# Altium PCB MT-MONITOR V1.0.0.PcbDoc (part 1 of 3)
Units mil, origin at the board's own origin, x right, y up, seen from the top; angles counter-clockwise.
Board outline 6300 x 4410 mil, 2 copper layers (Top Layer, Bottom Layer); 313 components, 231 nets, 1781 pads, 138 vias.
Unrouted connection lines stored in the file: 1.
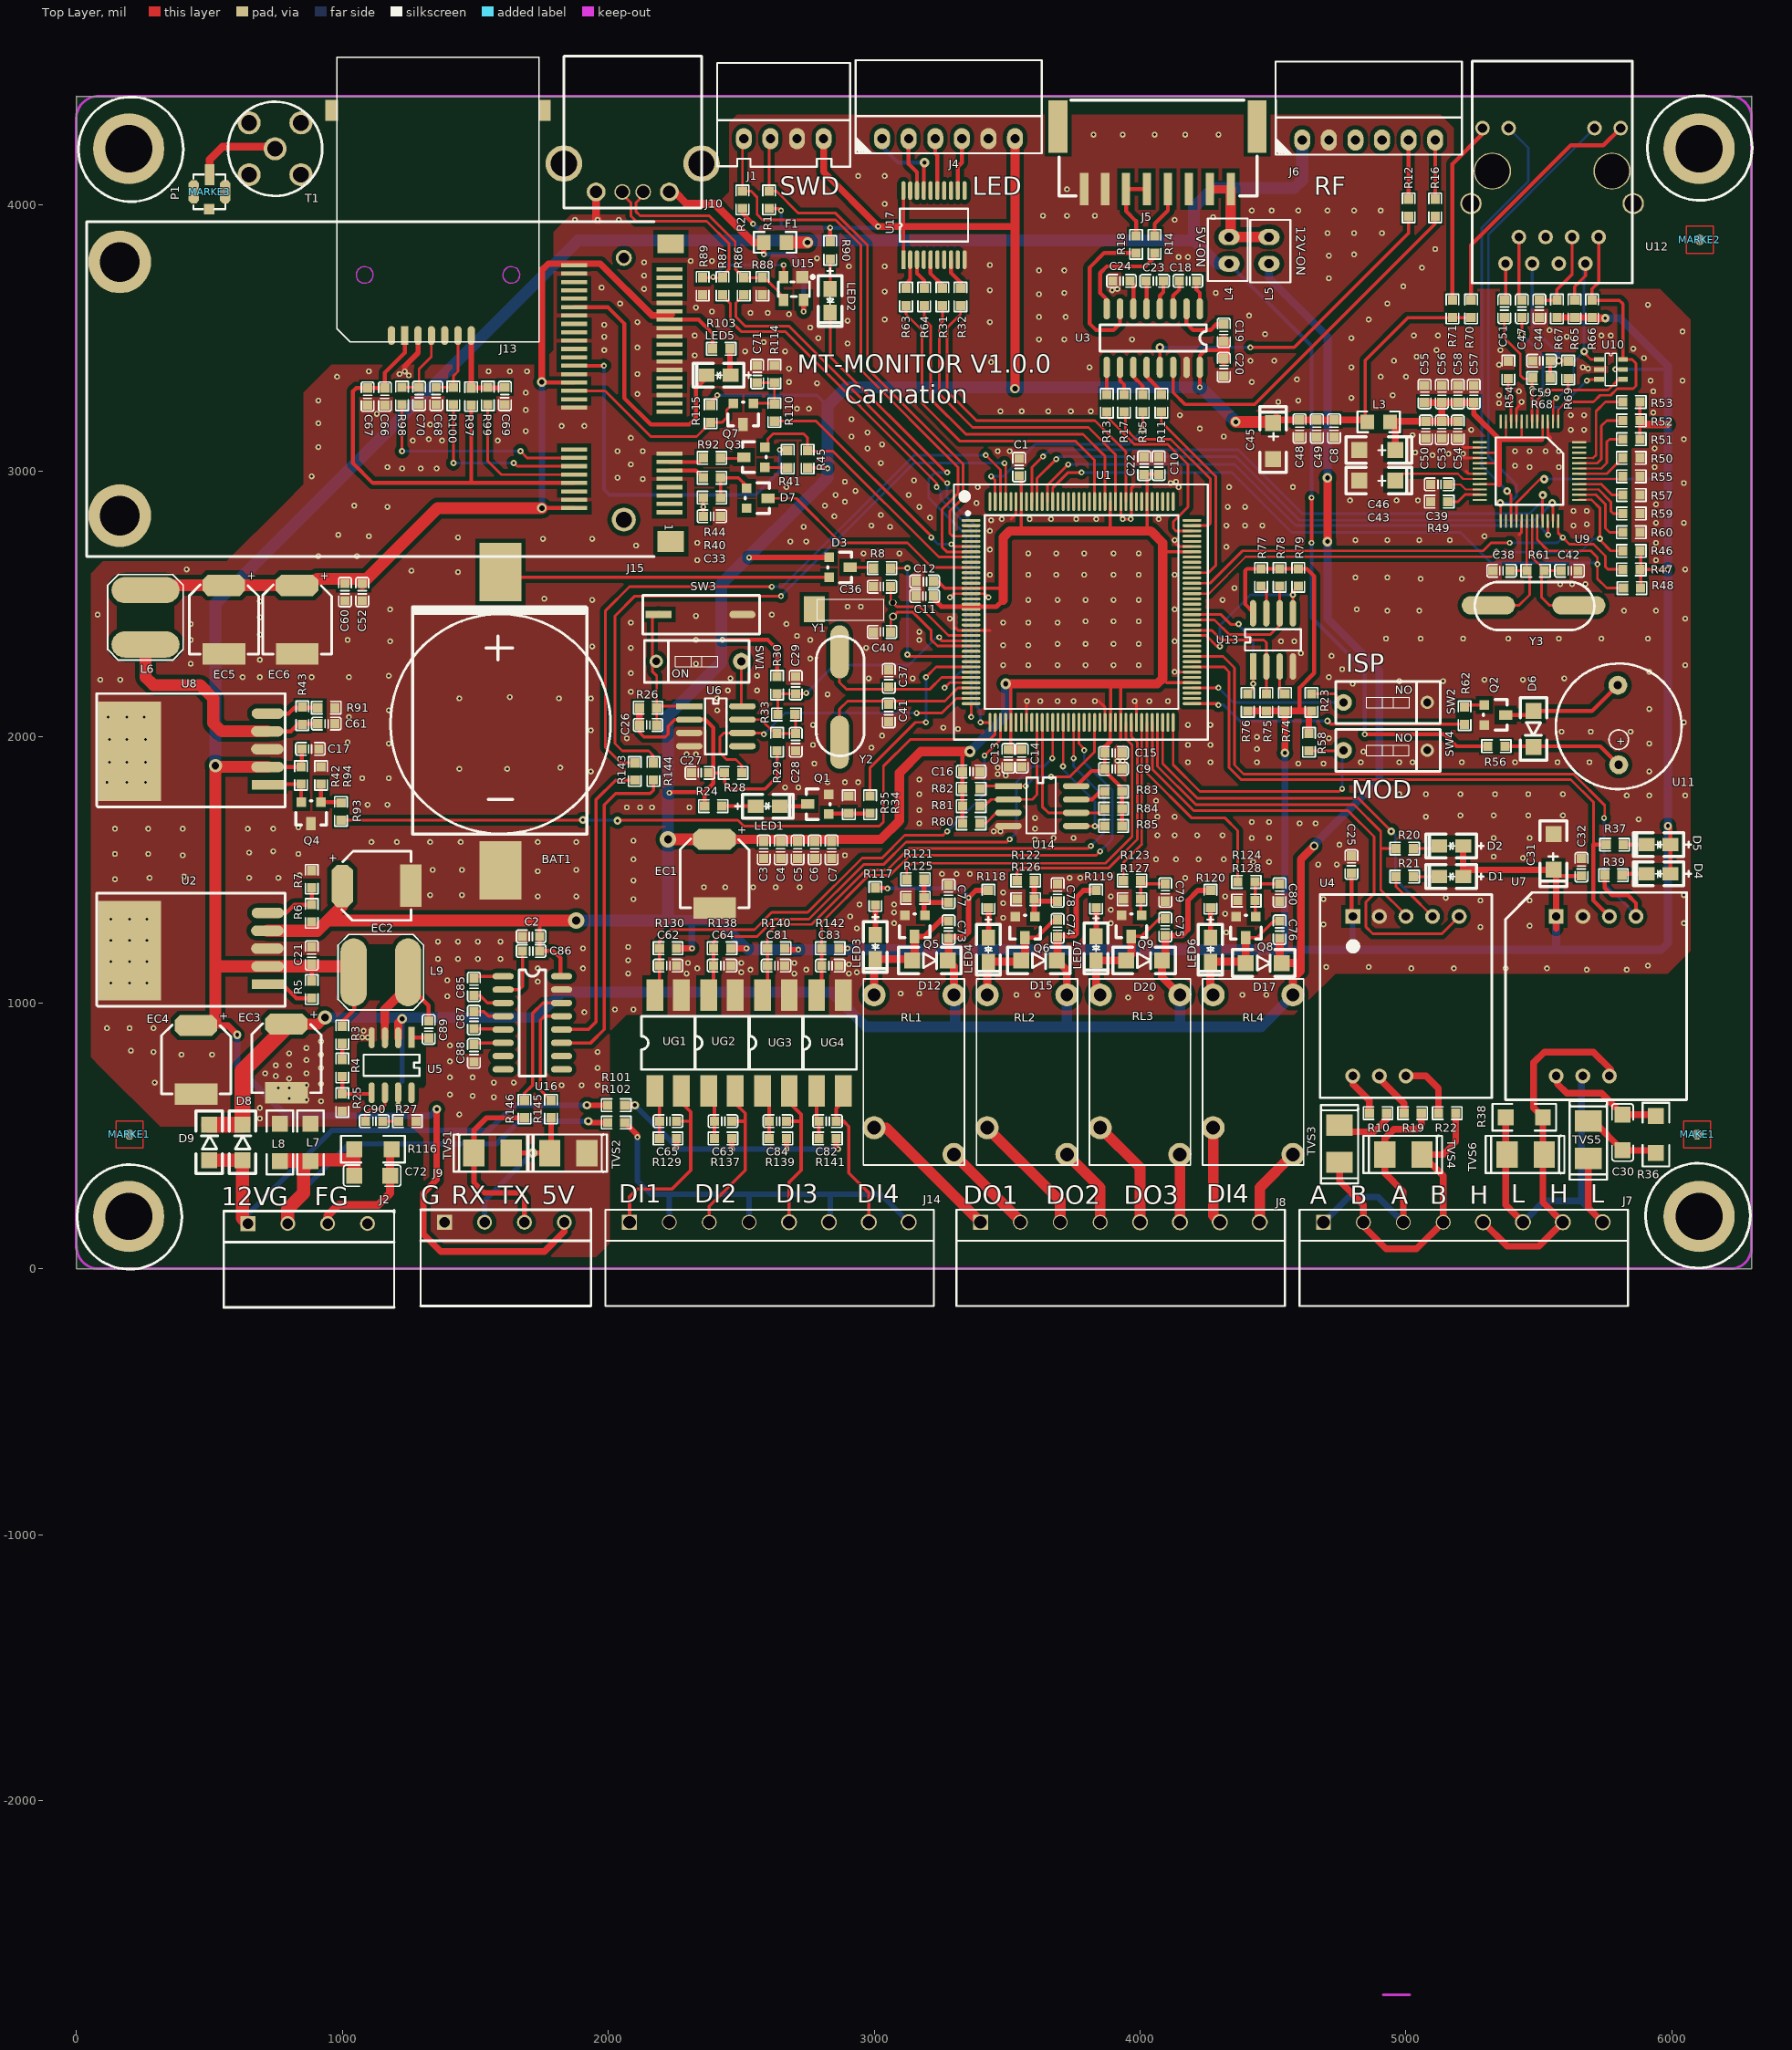
[diagram p0: Top Layer view]
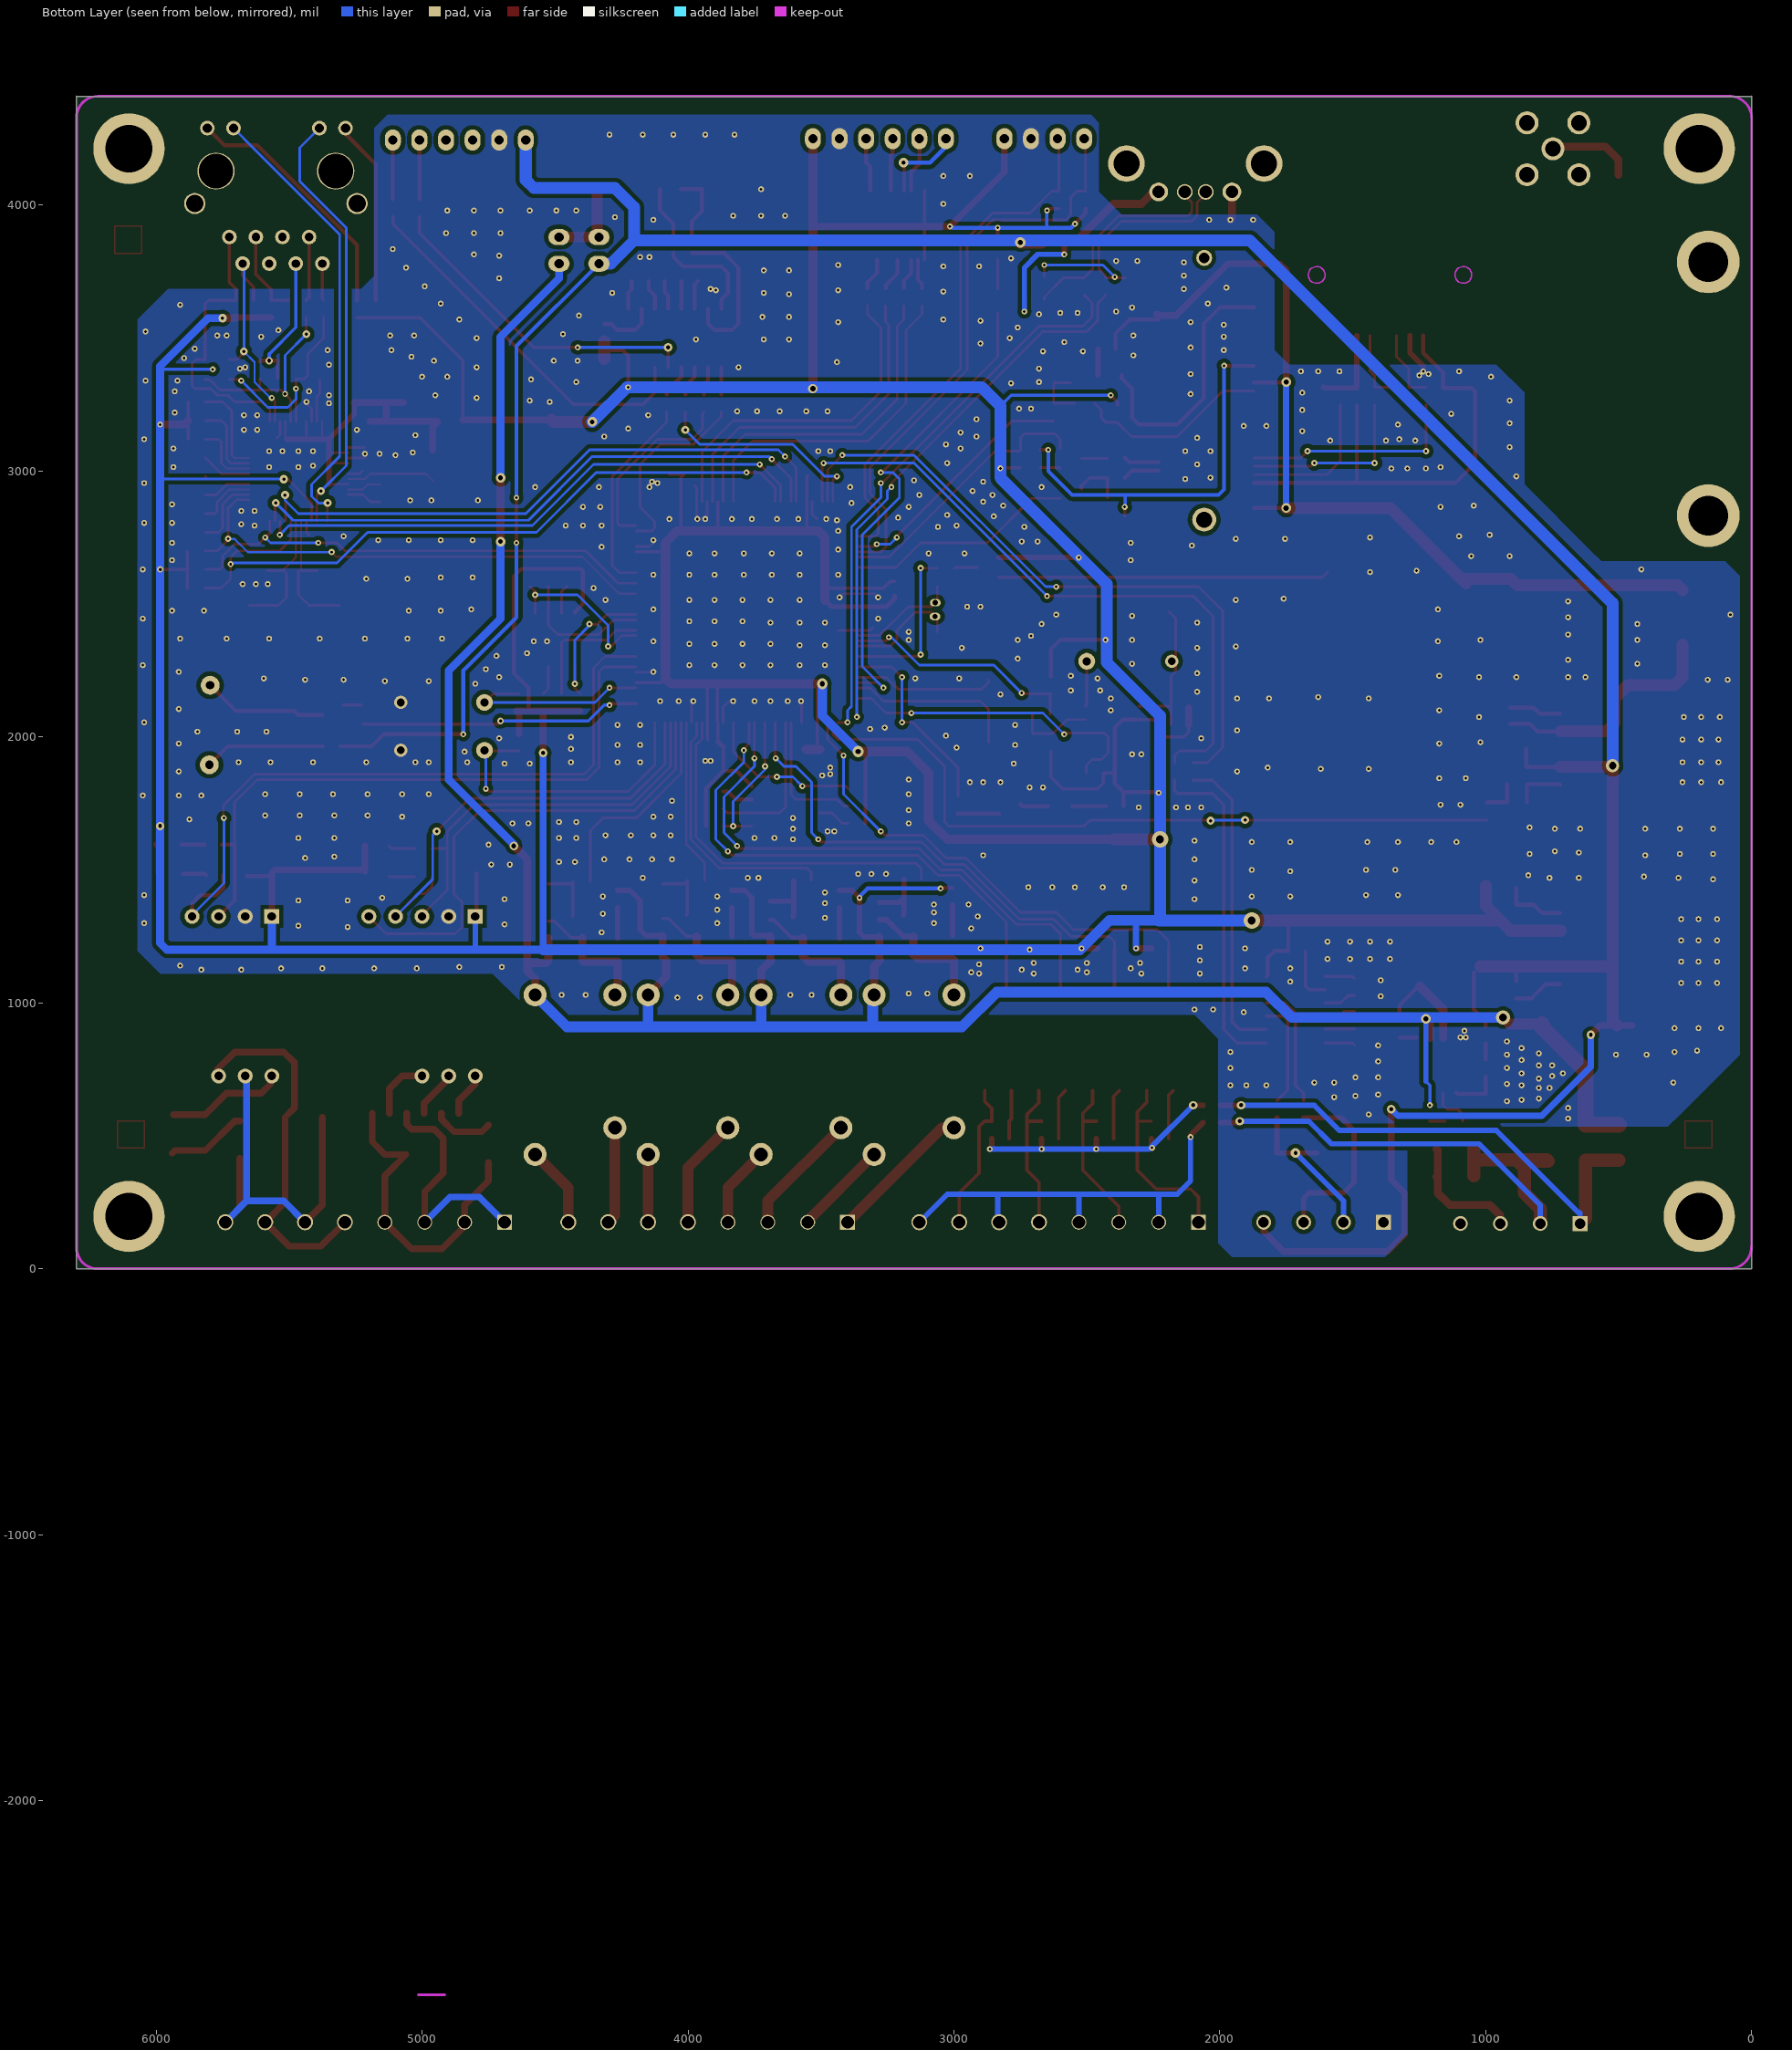
[diagram p1: Bottom Layer view, seen from below]

## Layer stack, top to bottom
Top Layer: signal copper 1.4
Dielectric: dielectric 12.6, FR-4, Dk 4.8
Bottom Layer: signal copper 1.4

## Board outline
0,0 0,60 0,4410 0.55,4409.45 520,4409.45 6299.45,4409.45 6300,4410 6300,4310 6300,0

## Design rules (kind name [scope] priority, off if disabled: settings)
Clearance [All] p1 off: gap=10
ComponentClearance [All] p1 off: gap=10 collisioncheckmode=3 verticalgap=10 showdistances=FALSE
DiffPairsRouting [All] p1: maxlimit=100 minlimit=8 mostfreqgap=10 maxuncoupledlength=500
MinimumSolderMaskSliver [All] p1 off: minsoldermaskwidth=10
PasteMaskExpansion [All] p1 off: expansion=0
PlaneConnect [All] p1: planeconnectstyle=Direct reliefexpansion=20 reliefentries=4 reliefconductorwidth=10 reliefairgap=10
PolygonConnect [All] p1: connectstyle=Direct reliefconductorwidth=10 reliefentries=4 polygonreliefangle="90 Angle" airgapwidth=10
RoutingVias [All] p1: holewidth=10 width=24 viastyle="Through Hole" minholewidth=8 minwidth=12 maxholewidth=50 maxwidth=80
SilkToSilkClearance [All] p1 off: silktosilkclearance=10
SilkToSolderMaskClearance [IsPad] p1 off: minsilkscreentomaskgap=10 clearancetoexposedcopper=TRUE
SolderMaskExpansion [All] p1 off: expansion=4
UnConnectedPin [All] p1 off:
Width [All] p1: maxlimit=196.85 minlimit=8 preferedwidth=10 minimp=50.000000 maximp=50.000000 favimp=50.000000
21 further rules are at their usual default settings.

## Components (designator, comment, footprint, x,y, rotation, side; value= is the part's Value field where it differs from the comment)
BAT1 "Battery" battery 1595,2620 r180 top locked
C1 "104" 0603C 3545,3015 r90 top
C2 "104" 0603C 1710,1250 r180 top
C3 "104" 0603C 2585,1575 r270 top
C4 "104" 0603C 2648.75,1575 r270 top
C5 "104" 0603C 2712.5,1575 r270 top
C6 "104" 0603C 2776.25,1575 r270 top
C7 "104" 0603C 2840,1575 r270 top
C8 "104" 0603C 4730,3160 r270 top
C9 "104" 0603C 3900,1880 r0 top
C10 "104" 0603C 4070,3020 r90 top
C11 "104" 0603C 3190,2530 r180 top
C12 "104" 0603C 3190,2585 r0 top
C13 "104" 0603C 3505,1920 r270 top
C14 "104" 0603C 3555,1920 r270 top
C15 "104" 0603C 3900,1940 r0 top
C16 "103" 0603C 3365,1870 r0 top
C17 "104" 0603C 880,1955 r180 top
C18 "0.1uF" 0603C 4180,3715 r0 top
C19 "0.1uF" 0603C 4315,3520 r270 top
C20 "1uF" 0603C 4315,3390 r90 top
C21 "104" 0603C 885,1178.34 r270 top
C22 "104" 0603C 4015,3020 r90 top
C23 "0.1uF" 0603C 4055,3715 r0 top
C24 "0.1uF" 0603C 3930,3715 r0 top
C25 "104" 0603C 4795,1520 r90 top
C26 "104" 0603C 2150,2045 r0 top
C27 "104" 0603C 2345,1865 r180 top
C28 "104" 0603C 2705,1980 r90 top
C29 "104" 0603C 2705,2195 r270 top
C30 "103/2KV/1206" 1206C 5815,580 r270 top
C31 "10uF/16V" CA1206 5555,1500 r270 top
C32 "0.1uF" 0603C 5660,1510 r270 top
C33 "0.1uF" C0603 2390,2830 r0 top
C36 "22P" 0603C 3030,2565 r180 top
C37 "22P" 0603C 3055,2220 r90 top
C38 "18p" 0603C 5360,2625 r180 top
C39 "0.1u" 0603C 5125,2950 r0 top
C40 "22P" 0603C 3030,2395 r180 top
C41 "22P" 0603C 3055,2090 r270 top
C42 "18p" 0603C 5615,2625 r0 top
C43 "4.7uF/6.3V" CA1206 4960,2965 r0 top
C44 "0.22u" 0603C 5502,3610 r90 top
C45 "22uF/16V" CA1206 4500,3180 r90 top
C46 "22uF/16V" CA1206 4960,3080 r0 top
C47 "0.068uF" 0603C 5436,3610 r90 top
C48 "0.1u" 0603C 4600,3160 r270 top
C49 "0.1u" 0603C 4665,3160 r270 top
C50 "0.1u" 0603C 5075,3155 r270 top
C51 "0.068uF" 0603C 5370,3610 r90 top
C52 "0.1uF" C0603 1075,2545 r270 top
C53 "0.1u" 0603C 5135,3155 r270 top
C54 "0.1u" 0603C 5195,3155 r270 top
C55 "0.1u" 0603C 5070,3290 r90 top
C56 "0.1u" 0603C 5135,3290 r90 top
C57 "0.1u" 0603C 5255,3290 r90 top
C58 "0.1u" 0603C 5195,3290 r90 top
C59 "0.1u" 0603C 5510,3415 r180 top
C60 "0.1uF" C0603 1010,2545 r270 top
C61 "0.1uF" C0603 940,2050 r0 top
C62 "104" 0603C 2225,1140 r0 top
C63 "104" 0603C 2431.67,555 r0 top
C64 "104" 0603C 2428.33,1140 r0 top
C65 "104" 0603C 2225,555 r0 top
C66 "33pF" C0603 1160,3280 r270 top
C67 "1uF" C0603 1095,3280 r270 top
C68 "33pF" C0603 1353.12,3282.5 r270 top
C69 "33pF" C0603 1611.25,3282.5 r270 top
C70 "33pF" C0603 1288.75,3282.5 r270 top
C71 "0.1uF" C0603 2560,3365 r90 top
C72 "103/2KV/1206" 1206C 1045,350 r0 top
C73 "104" 0603C 3280,1275 r90 top
C74 "104" 0603C 3690,1280 r270 top
C75 "104" 0603C 4095,1285 r270 top
C76 "104" 0603C 4525,1275 r90 top
C77 "104" 0603C 3280,1410 r90 top
C78 "104" 0603C 3690,1415 r270 top
C79 "104" 0603C 4095,1415 r90 top
C80 "103" 0603C 4525,1415 r270 top
C81 "104" 0603C 2631.67,1140 r0 top
C82 "104" 0603C 2825,555 r0 top
C83 "104" 0603C 2835,1140 r0 top
C84 "104" 0603C 2638.33,555 r0 top
C85 "0.1uF" 0603C 1495,1060 r90 top
C86 "0.1uF" 0603C 1710,1195 r0 top
C87 "0.1uF" 0603C 1495,935 r90 top
C88 "0.1uF" 0603C 1495,810 r90 top
C89 "103" 0603C 1325,900 r270 top
C90 "3.9nF" 0603C 1120,555 r0 top
D1 "LED" D0805 5215,1475 r270 top
D2 "LED" D0805 5215,1590 r270 top
D3 "BAV54C" SOT23 2830,2675 r270 top
D4 "LED" D0805 5995,1485 r270 top
D5 "LED" D0805 5995,1595 r270 top
D6 "1N4148" 1206D 5480,2030 r270 top
D7 "BAT54-V" SOT23 2520,2935 r270 top
D8 "1N4007" 1206D 625,475 r90 top
D9 "1N4007" 1206D 500,475 r90 top
D12 "1N4007" 1206D 3210,1160 r0 top
D15 "1N4007" 1206D 3620,1160 r0 top
D17 "1N4007" 1206D 4465,1150 r0 top
D20 "1N4007" 1206D 4015,1160 r0 top
EC1 "100uF/16V" C100UF16VEJ 2400,1615 r270 top
EC2 "100uF,25V" C100UF16VEJ 1000,1440 r0 top
EC3 "100uF,25V" C100UF16VEJ 790,920 r270 top
EC4 "100uF/35V" C100UF16VEJ 450,915 r270 top
EC5 "220uF/10V" C100UF16V 555,2570 r270 top
EC6 "220uF/10V" C100UF16V 830,2570 r270 top
F1 "0.5A/0805" 0805R 2670,3860 r180 top
J1 "HEADER 4" COM-2.54mm-90 2510,4270 r0 top
J2 "HEADER 4" KF2EDG-4P-3.81mm 645,170 r0 top
J4 "CON6" CON6-2.54mm-90 3030,4250 r0 top
J5 "CON8" HY-8A-2.00mm 3790,4060 r180 top
J6 "CON6" CON6-2.54mm-90 4610,4245 r0 top locked
J7 "CON8" KF2EDG-8P-3.81mm 4690,175 r0 top locked
J8 "CON8" KF2EDG-8P-3.81mm 3400,175 r0 top locked
J9 "HEADER 4" KF2EDG-4P-3.81mm 1385,175 r0 top locked
J10 "CON5" USB-A 2230,4050 r180 top locked
J13 "GPRS,UIM" SIM6-AUTO 1235,3510 r180 top locked
J14 "CON8" KF2EDG-8P-3.81mm 2080,175 r0 top locked
J15 "PCI-E" MC2716 2230,2845 r270 top locked
L3 "1uH" 0805R 4855,3185 r0 top
L4 "0" CON02_2.54 4335,3930 r90 top
L5 "0" CON02_2.54 4485,3730 r270 top
L6 "22uH" LC7*7*3_L 260,2450 r90 top
L7 "1uH" 1206R 880,405 r90 top
L8 "1uH" 1206R 765,405 r90 top
L9 "22uH" LC7*7*3_L 1145,1115 r180 top
LED1 "RED" D0805 2555,1740 r90 top
LED2 "RED" D0805 2835,3685 r0 top
LED3 "RED" D0805 3005,1255 r0 top
LED4 "RED" D0805 3430,1245 r0 top
LED5 "Green" D0805 2460,3360 r270 top
LED6 "RED" D0805 4265,1245 r0 top
LED7 "RED" D0805 3835,1250 r0 top
MAKE1 "MARK1.0" MARK1.0 6095,505 r90 top
MARKE1 "MARK1.0" MARK1.0 200,505 r90 top
MARKE2 "MARK1.0" MARK1.0 6105,3870 r90 top
MARKE3 "P1" IPEX 560,4050 r90 top
Q1 "8050" SOT23 2830,1710 r90 top
Q2 "8050" SOT23 5295,2120 r270 top
Q3 "9013" SOT23 2590,3015 r90 top
Q4 "9013" SOT23 920,1755 r180 top
Q5 "8050" SOT23 3190,1330 r180 top
Q6 "8050" SOT23 3605,1325 r180 top
Q7 "9013" SOT23 2545,3255 r180 top
Q8 "8050" SOT23 4435,1325 r180 top
Q9 "8050" SOT23 4005,1330 r180 top
R1 "10K" 0603R 2605,4020 r270 top
R2 "10K" 0603R 2505,4020 r270 top
R3 "43k" 0603R 1000,880 r270 top
R4 "1.2kΩ" 0603R 1000,755 r270 top
R5 "4K7" 0603R 885,1050 r270 top
R6 "2K/1%" 0603R 885,1336.67 r270 top
R7 "1.2K/1%" 0603R 885,1465 r270 top
R8 "20K" 0603R 3030,2635 r0 top
R10 "10R" 0603R 4895,585 r0 top
R11 "0R" 0603R 4080,3255 r90 top
R12 "10R" 0603R 5010,3990 r90 top
R13 "0R" 0603R 3875,3255 r90 top
R14 "10R" 0603R 4055,3852.5 r90 top
R15 "0R" 0603R 4010,3255 r90 top
R16 "10R" 0603R 5110,3990 r90 top
R17 "0R" 0603R 3940,3255 r90 top
R18 "10R" 0603R 3985,3852.5 r90 top
R19 "10R" 0603R 5025,585 r0 top
R20 "10R" 0603R 4995,1580 r180 top
R21 "10R" 0603R 4995,1475 r180 top
R22 "10R" 0603R 5155,585 r0 top
R23 "10K" 0603R 4645,2130 r270 top
R24 "10K" 0603R 2395,1740 r180 top
R25 "10k" 0603R 1000,625 r270 top
R26 "10K" 0603R 2150,2110 r180 top
R27 "6.8k" 0603R 1245,555 r0 top
R28 "10K" 0603R 2470,1865 r0 top
R29 "10K" 0603R 2635,1980 r90 top
R30 "10K" 0603R 2635,2195 r270 top
R31 "2K" 0603R 3256.67,3655 r90 top
R32 "2K" 0603R 3325,3655 r90 top
R33 "1kR" 0603R 2670,2085 r180 top
R34 "10K" 0603R 2985,1745 r270 top
R35 "10K" 0603R 2905,1745 r270 top
R36 "1M" 1206R 5940,575 r270 top
R37 "2k" 0603R 5785,1595 r180 top
R38 "120R" 1206R 5374.67,570.04 r0 top
R39 "2k" 0603R 5780,1480 r180 top
R40 "5.1K" R0603 2390,2900 r180 top
R41 "10K" R0603 2675,3045 r90 top
R42 "10K" R0603 845,1855 r90 top
R43 "2.7K 1%" R0603 850,2080 r270 top
R44 "100R" R0603 2390,2975 r0 top
R45 "10K" R0603 2750,3045 r90 top
R46 "10k" 0603R 5847.5,2700 r0 top
R47 "10k" 0603R 5847.5,2630 r0 top
R48 "10k" 0603R 5850,2560 r0 top
R49 "10k" 0603R 5125,2885 r180 top
R50 "10k" 0603R 5847.49,3050 r180 top
R51 "10k" 0603R 5847.49,3120 r180 top
R52 "10k" 0603R 5847.49,3190 r180 top
R53 "10k" 0603R 5847.49,3260 r180 top
R54 "12.4K[1%]" 0603R 5385,3380 r90 top
R55 "10K" 0603R 5847.5,2980 r0 top
R56 "10R" 0603R 5340,1965 r180 top
R57 "10K" 0603R 5847.5,2910 r0 top
R58 "10K" 0603R 4635,1980 r90 top
R59 "10k" 0603R 5847.5,2840 r0 top
R60 "10k" 0603R 5847.5,2770 r0 top
R61 "1M" 0603R 5487.5,2625 r0 top
R62 "4K7" 0603R 5220,2080 r270 top
R63 "2K" 0603R 3120,3655 r90 top
R64 "2K" 0603R 3188.33,3655 r90 top
R65 "49.9[1%]" 0603R 5634,3610 r270 top
R66 "49.9[1%]" 0603R 5700,3610 r270 top
R67 "10[1%]" 0603R 5568,3610 r270 top
R68 "82[1%]" 0603R 5510,3350 r180 top
R69 "82[1%]" 0603R 5610,3380 r270 top
R70 "200" 0603R 5245,3610 r90 top
R71 "200" 0603R 5175,3610 r90 top
R74 "10K" 0603R 4545,2130 r90 top
R75 "10K" 0603R 4475,2130 r90 top
R76 "10K" 0603R 4405,2130 r90 top
R77 "10K" 0603R 4455,2600 r270 top
R78 "10K" 0603R 4525,2600 r270 top
R79 "10K" 0603R 4595,2600 r270 top
R80 "10K" 0603R 3365,1675 r0 top
R81 "10K" 0603R 3365,1740 r0 top
R82 "10K" 0603R 3365,1805 r0 top
R83 "10K" 0603R 3900,1795 r180 top
R84 "10K" 0603R 3900,1730 r180 top
R85 "10K" 0603R 3899.99,1665 r180 top
R86 "33R" 0603R 2510,3695 r270 top
R87 "33R" 0603R 2430,3695 r270 top
R88 "15K" 0603R 2580,3695 r90 top
R89 "15K" 0603R 2355,3695 r90 top
R90 "15K" 0603R 2835,3830 r90 top
R91 "1.2K 1%" R0603 940,2110 r0 top
R92 "100R" R0603 2390,3050 r180 top
R93 "2K" R0603 995,1720 r90 top
R94 "10K" R0603 920,1855 r270 top
R97 "10K" R0603 1485,3280 r270 top
R98 "22R" R0603 1224.38,3282.49 r270 top
R99 "22R" R0603 1546.88,3282.49 r270 top
R100 "22R" R0603 1417.5,3282.49 r270 top
R101 "0R" 0603R 2030,615 r0 top
R102 "0R" 0603R 2030,550 r0 top
R103 "470R" R0603 2425,3460 r0 top
R110 "10K" R0603 2625,3220 r270 top
R114 "10K" R0603 2625,3365 r90 top
R115 "10K" R0603 2385,3215 r270 top
R116 "1M" 1206R 1045,450 r0 top
R117 "10K" 0603R 3005,1400 r90 top
R118 "10K" 0603R 3430,1390 r90 top
R119 "10K" 0603R 3835,1390 r90 top
R120 "10K" 0603R 4265,1390 r90 top
R121 "5.1K" 0603R 3155,1465 r0 top
R122 "5.1K" 0603R 3570,1460 r0 top
R123 "5.1K" 0603R 3970,1460 r0 top
R124 "5.1K" 0603R 4400,1455 r0 top
R125 "4.7K" 0603R 3155,1395 r0 top
R126 "4.7K" 0603R 3570,1390 r0 top
R127 "4.7K" 0603R 3970,1390 r0 top
R128 "4.7K" 0603R 4400,1385 r0 top
R129 "10K" 0603R 2225,490 r180 top
R130 "10K" 0603R 2225,1205 r180 top
R137 "10K" 0603R 2431.67,490 r180 top
R138 "10K" 0603R 2428.33,1205 r180 top
R139 "10K" 0603R 2638.33,490 r180 top
R140 "10K" 0603R 2631.67,1205 r180 top
R141 "10K" 0603R 2825,490 r180 top
R142 "10K" 0603R 2835,1205 r180 top
R143 "0R" 0603R 2100,1870 r270 top
R144 "0R" 0603R 2170,1870 r270 top
R145 "10R" 0603R 1785,600 r270 top
R146 "10R" 0603R 1685,600 r270 top
RL1 "JQ1P-24V" HF32F-12V 3040,1030 r90 top
RL2 "JQ1P-24V" HF32F-12V 3465,1030 r90 top
RL3 "JQ1P-24V" HF32F-12V 3890,1030 r90 top
RL4 "JQ1P-24V" HF32F-12V 4315,1030 r90 top
SW1 "SW SPST" SW1#1 2165,2285 r270 top
SW2 "SW SPST" SW1#2 5100.57,2129.57 r90 top
SW3 "按键" SW 2190,2460 r0 top
SW4 "SW SPST" SW1#3 5100.22,1949.57 r90 top
T1 "MARK1.0" TXZ-GSM 650,4115 r45 top locked
TVS1 "BA301N/NC" 3528TVS 1495,435 r180 top
TVS2 "BA301N" 3528TVS 1920,435 r0 top
TVS3 "BA301N" 3528TVS 4750,540 r90 top
TVS4 "BA301N" 3528TVS 5060,430 r0 top
TVS5 "BA301N" 3528TVS 5685.25,555.09 r90 top
TVS6 "BA301N" 3528TVS 5520,430 r0 top
U1 "LPC1778FBD144" LC-LQFP-144_20x20x05P 3780,2470 r270 top
U2 "MIC29302" TO5B 720,1070 r180 top
U3 "SP3232" SO-16 4225,3610 r270 top
U4 "RSM485S_CTM8251T" RSM485 4800,1325 r0 top
U5 "EUP3484" SOP8#1 1260,865 r270 top
U6 "SP706SEN" SOP8#2 2305,2115 r0 top
U7 "CTM8251" CTM8251KT 5565,1325 r270 top
U8 "MIC29302" TO5B 720,1820 r180 top
U9 "W5500" W5500 5480,2990 r270 top
U10 "NUP4301MR6" TSOP-6 5725,3420 r0 top
U11 "BELL" BUZ 5600,2045 r0 top
U12 "FC-256GYNL (or 13F-60FGYDPNW2)" RJ45-2 5725,3880 r0 top locked
U13 "FM25CL64" SOP8#2 4425.24,2265.24 r90 top
U14 "MX25L1635DM2I-10G" MX25L1635E 3505,1815 r0 top
U15 "PRTR5V0U2X" SOT-143B 2730,3730 r180 top
U16 "SP3232" SO-16 1605,1100 r0 top
U17 "74HC245" TSSOP20 3110,3795 r90 top
UG1 "PS2501L-1" DIP-4 2175,670 r180 top
UG2 "PS2501L-1" DIP-4 2377.79,670 r180 top
UG3 "PS2501L-1" DIP-4 2580.59,670 r180 top
UG4 "PS2501L-1" DIP-4 2783.38,670 r180 top
Y1 "32.768KHz" ZS-32.768 3070.21,2505.15 r180 top
Y2 "12M" ZS_SMD 2870,1980 r90 top
Y3 "25MHz" ZS_SMD 5310,2495 r0 top

## Footprints (in the part's own frame and the unit in brackets; to place one, negate y for a bottom-side part, rotate by r counter-clockwise, add the part's x,y. Pads: shape width x height; smd on the part's side, far side on the other; paste and mask are expansions set on the pad)
0603C [mil]
  rect 35x35 smd: 1(-32.5,0) 2(32.5,0)
  silkscreen extent -55,-24 55,24
0603R [mil]
  rect 35x35 smd: 1(-32.5,0) 2(32.5,0)
  silkscreen extent -55,-24 55,24
0805R [mil]
  rect 52x56 smd: 1(0,0) 2(85,0)
  silkscreen extent -37,-39 122,39
1206C [mil]
  rect 60x60 smd: 1(0,0) 2(135,0)
  silkscreen extent -40,-40 175,40
1206D [mil]
  rect 60x60 smd: 1(-67.5,0) 2(67.5,0)
  silkscreen extent -118,-50 117,50
1206R [mil]
  rect 60x60 smd: 1(0.33,-0.04) 2(140.33,-0.04)
  silkscreen extent -50,-50 190,50
3528TVS [mil]
  rect 80x100 smd: 1(0.09,-0.25) 2(-139.91,-0.25)
  silkscreen extent -220,-70 76,70
battery [mm]
  rect 4x5.588 smd mask+0.102: 1(0,0)
  rect 4x5.588 smd: 2(0,28.5)
  silkscreen extent -10.5,3.3 10.5,25.02
BUZ [mm]
  round 1.8 hole 0.8: 1(5.08,-3.8) 2(5,3.8)
  silkscreen extent -0.92,-6.13 11.08,5.87
C100UF16V [mil]
  oct 80x160 smd: 1(-0.01,-0.43)
  rect 80x160 smd: 2(257.94,0.35)
  silkscreen extent -2,-130 258,130, body extent 20,-115 240,125, height 197
C100UF16VEJ [mil]
  oct 80x160 smd: 1(-0.01,-0.43)
  rect 80x160 smd: 2(257.94,0.35)
  silkscreen extent -2,-130 258,130
C0603 [mil]
  rect 35x35 smd: 1(-32.5,0) 2(32.5,0)
  silkscreen extent -55,-24 55,24, body extent -33,-15 29,16, height 12
CA1206 [mil]
  rect 60x60 smd: 1(-0.08,-0.48) 2(-135.08,-0.48)
  silkscreen extent -185,-50 62,50
COM-2.54mm-90 [mil]
  oval 60x80 hole 35: 1(0,-20) 2(100,-20) 3(200,-20) 4(300,-20)
  silkscreen extent -100,-125 400,265, body extent -28,-60 334,20, height 264
CON02_2.54 [mil]
  oval 60x80 hole 35: 1(-150,0) 2(-50,0)
  silkscreen extent -215,-70 20,80
CON6-2.54mm-90 [mil]
  oval 60x80 hole 35: 1(0,0) 2(100,0) 3(200,0) 4(300,0) 5(400,0) 6(500,0)
  silkscreen extent -100,-55 600,295
CTM8251KT [mil]
  rect 56x56 hole 32: 1(0,0)
  round 56 hole 32: 2(0,100) 3(0,200) 4(0,300) 6(600,200) 7(600,100) 8(600,0)
  silkscreen extent -90,-190 690,490, body extent -90,-190 690,490, height 276
D0805 [mil]
  rect 50x60 smd: 1(-0.34,-0.09) 2(-0.34,-90.09)
  silkscreen extent -45,-140 45,77
DIP-4 [mm]
  rect 1.6x3 smd: 1(-0.008,0.015) 2(-2.548,0.015) 3(-2.548,-9.129) 4(-0.008,-9.129)
  silkscreen extent -3.82,-7.1 1.26,-2.02
HF32F-12V [mm]
  round 2.2 hole 1.2: 1(0,1.016) 2(0,-6.604)
  round 2.2 hole 1.3: 3(-12.7,1.016) 4(-15.24,-6.604)
  silkscreen extent -16.26,-7.62 1.52,2.03
HY-8A-2.00mm [mm]
  rect 1.8x5 smd: 0(-16.5,-6) 0(2.5,-6)
  rect 0.8x3.1 smd: 1(-14,0) 2(-12,0) 3(-10,0) 4(-8,0) 5(-6,0) 6(-4,0) 7(-2,0) 8(0,0)
  silkscreen extent -16.51,-8.51 2.41,0.64
IPEX [mm]
  rect 2x0.9 smd: 1(1.651,1.5)
  oct 2.2x1 smd: 2(0,3) 2(0,0)
  rect 1x1 smd: 3(-1.651,1.524)
  silkscreen extent -1.65,0 1.65,3.05
KF2EDG-4P-3.81mm [mil]
  rect 56x56 hole 39.37: 1(0,0)
  round 56 hole 39.37: 2(150,0) 3(300,0) 4(450,0)
  silkscreen extent -91,-315 550,50
KF2EDG-8P-3.81mm [mil]
  rect 56x56 hole 47.24: 1(0,0)
  round 56 hole 47.24: 2(150,0) 3(300,0) 4(450,0)
  round 60 hole 47.24: 5(600,0) 6(750,0) 7(900,0) 8(1050,0)
  silkscreen extent -91,-315 1145,47
LC7*7*3_L [mm]
  oval 2.5x6.5 smd: 1(-2.6,0) 2(2.6,0)
  Top Layer pour cut-out: -1.803,2.705 1.854,2.705 1.854,-2.705 -1.803,-2.705
  silkscreen extent -4.09,-3.61 4.09,3.61, body extent -2.46,-2.4 1.85,2.4, height 3.5
LC-LQFP-144_20x20x05P [mm]
  oval 0.28x1.8 smd mask+0.051: 1(-8.75,-10.55) 2(-8.25,-10.55) 3(-7.75,-10.55) 4(-7.25,-10.55) 5(-6.75,-10.55) 6(-6.25,-10.55) 7(-5.75,-10.55) 8(-5.25,-10.55) 9(-4.75,-10.55) 10(-4.25,-10.55) 11(-3.75,-10.55) 12(-3.25,-10.55) 13(-2.75,-10.55) 14(-2.25,-10.55) 15(-1.75,-10.55) 16(-1.25,-10.55) 17(-0.75,-10.55) 18(-0.25,-10.55) 19(0.25,-10.55) 20(0.75,-10.55) 21(1.25,-10.55) 22(1.75,-10.55) 23(2.25,-10.55) 24(2.75,-10.55) 25(3.25,-10.55) 26(3.75,-10.55) 27(4.25,-10.55) 28(4.75,-10.55) 29(5.25,-10.55) 30(5.75,-10.55) 31(6.25,-10.55) 32(6.75,-10.55) 33(7.25,-10.55) 34(7.75,-10.55) 35(8.25,-10.55) 36(8.75,-10.55) 73(8.75,10.55) 74(8.25,10.55) 75(7.75,10.55) 76(7.25,10.55) 77(6.75,10.55) 78(6.25,10.55) 79(5.75,10.55) 80(5.25,10.55) 81(4.75,10.55) 82(4.25,10.55) 83(3.75,10.55) 84(3.25,10.55) 85(2.75,10.55) 86(2.25,10.55) 87(1.75,10.55) 88(1.25,10.55) 89(0.75,10.55) 90(0.25,10.55) 91(-0.25,10.55) 92(-0.75,10.55) 93(-1.25,10.55) 94(-1.75,10.55) 95(-2.25,10.55) 96(-2.75,10.55) 97(-3.25,10.55) 98(-3.75,10.55) 99(-4.25,10.55) 100(-4.75,10.55) 101(-5.25,10.55) 102(-5.75,10.55) 103(-6.25,10.55) 104(-6.75,10.55) 105(-7.25,10.55) 106(-7.75,10.55) 107(-8.25,10.55) 108(-8.75,10.55)
  oval 1.8x0.28 smd mask+0.051: 37(10.55,-8.75) 38(10.55,-8.25) 39(10.55,-7.75) 40(10.55,-7.25) 41(10.55,-6.75) 42(10.55,-6.25) 43(10.55,-5.75) 44(10.55,-5.25) 45(10.55,-4.75) 46(10.55,-4.25) 47(10.55,-3.75) 48(10.55,-3.25) 49(10.55,-2.75) 50(10.55,-2.25) 51(10.55,-1.75) 52(10.55,-1.25) 53(10.55,-0.75) 54(10.55,-0.25) 55(10.55,0.25) 56(10.55,0.75) 57(10.55,1.25) 58(10.55,1.75) 59(10.55,2.25) 60(10.55,2.75) 61(10.55,3.25) 62(10.55,3.75) 63(10.55,4.25) 64(10.55,4.75) 65(10.55,5.25) 66(10.55,5.75) 67(10.55,6.25) 68(10.55,6.75) 69(10.55,7.25) 70(10.55,7.75) 71(10.55,8.25) 72(10.55,8.75) 109(-10.55,8.75) 110(-10.55,8.25) 111(-10.55,7.75) 112(-10.55,7.25) 113(-10.55,6.75) 114(-10.55,6.25) 115(-10.55,5.75) 116(-10.55,5.25) 117(-10.55,4.75) 118(-10.55,4.25) 119(-10.55,3.75) 120(-10.55,3.25) 121(-10.55,2.75) 122(-10.55,2.25) 123(-10.55,1.75) 124(-10.55,1.25) 125(-10.55,0.75) 126(-10.55,0.25) 127(-10.55,-0.25) 128(-10.55,-0.75) 129(-10.55,-1.25) 130(-10.55,-1.75) 131(-10.55,-2.25) 132(-10.55,-2.75) 133(-10.55,-3.25) 134(-10.55,-3.75) 135(-10.55,-4.25) 136(-10.55,-4.75) 137(-10.55,-5.25) 138(-10.55,-5.75) 139(-10.55,-6.25) 140(-10.55,-6.75) 141(-10.55,-7.25) 142(-10.55,-7.75) 143(-10.55,-8.25) 144(-10.55,-8.75)
  silkscreen extent -12.19,-12.19 12.19,12.07
MARK1.0 [mm]
  round 1 smd mask+0.5: 1(0,0)
  Top Layer lines w0.127: -1.3,1.3 1.3,1.3 1.3,-1.3 -1.3,-1.3 -1.3,1.3
MC2716 [mm]
  round 1.524 hole 0.991: 0(-24.3,-4.35)
  round 2.286 hole 1.524: 0(0.7,-4.35)
  rect 0.4x2.5 smd: 1(0,0) 2(-0.4,-9.1) 3(-0.8,0) 4(-1.2,-9.1) 5(-1.6,0) 6(-2,-9.1) 7(-2.4,0) 8(-2.8,-9.1) 9(-3.2,0) 10(-3.6,-9.1) 11(-4,0) 12(-4.4,-9.1) 13(-4.8,0) 14(-5.2,-9.1) 15(-5.6,0) 16(-6,-9.1) 17(-9.6,0) 18(-10,-9.1) 19(-10.4,0) 20(-10.8,-9.1) 21(-11.2,0) 22(-11.6,-9.1) 23(-12,0) 24(-12.4,-9.1) 25(-12.8,0) 26(-13.2,-9.1) 27(-13.6,0) 28(-14,-9.1) 29(-14.4,0) 30(-14.8,-9.1) 31(-15.2,0) 32(-15.6,-9.1) 33(-16,0) 34(-16.4,-9.1) 35(-16.8,0) 36(-17.2,-9.1) 37(-17.6,0) 38(-18,-9.1) 39(-18.4,0) 40(-18.8,-9.1) 41(-19.2,0) 42(-19.6,-9.1) 43(-20,0) 44(-20.4,-9.1) 45(-20.8,0) 46(-21.2,-9.1) 47(-21.6,0) 48(-22,-9.1) 49(-22.4,0) 50(-22.8,-9.1) 51(-23.2,0) 52(-23.6,-9.1)
  round 6 hole 3.8: 53(-23.92,-52.5) 54(0.316,-52.5)
  rect 1.8x2.5 smd: 55(-25.654,0.127)
  rect 2x2.5 smd: 56(2.794,0.127)
  silkscreen extent -27.77,-55.66 4.24,-1.44
MX25L1635E [mm]
  rect 2.54x0.6 smd: 1(0,0)
  oval 2.54x0.6 smd: 2(0,-1.27) 3(0,-2.54) 4(0,-3.81) 5(6.477,-3.81) 6(6.477,-2.54) 7(6.477,-1.27) 8(6.477,0)
  silkscreen extent 1.73,-4.52 4.52,0.81
R0603 [mil]
  rect 35x35 smd: 1(-32.5,0) 2(32.5,0)
  silkscreen extent -55,-24 55,24, body extent -34,-16 29,16, height 12
RJ45-2 [mm]
  round 2.032 hole 1.651: 0(-12.205,3.208)
  round 2.032 hole 1.626: 0(3.295,3.208)
  round 1.4 hole 0.8: 1(-0.005,0.008) 2(-1.275,-2.532) 3(-2.545,0.008) 4(-3.815,-2.532) 5(-5.085,0.008) 6(-6.355,-2.532) 7(-7.625,0.008) 8(-8.895,-2.532)
  round 1.4 hole 0.9: 9(2.095,10.408) 10(-0.405,10.408) 11(-8.605,10.408) 12(-11.105,10.408)
  round 3.556 hole 3.302: 13(-10.165,6.308) 14(1.265,6.308)
  silkscreen extent -12.1,-4.39 3.2,16.81
RSM485 [mil]
  rect 56x56 hole 32: 1(0,0)
  round 56 hole 32: 2(100,0) 3(200,0) 4(300,0) 5(400,0) 8(200,-600) 9(100,-600) 10(0,-600)
  silkscreen extent -123,-682 523,82
SIM6-AUTO [mm]
  rect 1.2x2 smd: 0(-13.337,-21.485) 0(6.983,-21.485)
  rect 0.7x1.8 smd: 1(0,0)
  oval 0.7x1.8 smd: 2(-2.54,0) 3(-5.08,0) 4(-1.27,0) 5(-3.81,0) 6(-6.35,0) 7(1.27,0)
  Keep-Out Layer lines w0.127: 3.027,-5.844 ccw(c3.825,-5.787) 3.025,-5.806 ; -10.973,-5.844 ccw(c-10.175,-5.787) -10.975,-5.806
  silkscreen extent -12.83,-26.56 6.47,0.61
SO-16 [mil]
  oval 80x24 smd: 1(-0.2,-0.3) 2(-0.2,-50.3) 3(-0.2,-100.3) 4(-0.2,-150.3) 5(-0.2,-200.3) 6(-0.2,-250.3) 7(-0.2,-300.3) 8(-0.2,-350.3) 9(219.8,-350.3) 10(219.8,-300.3) 11(219.8,-250.3) 12(219.8,-200.3) 13(219.8,-150.3) 14(219.8,-100.3) 15(219.8,-50.3) 16(219.8,-0.3)
  silkscreen extent 60,-375 160,25
SOP8#1 [mm]
  rect 2x0.6 smd: 1(-0.123,0.006)
  oval 2x0.6 smd: 2(-0.093,-1.264) 3(-0.093,-2.534) 4(-0.093,-3.804) 5(5.157,-3.804) 6(5.157,-2.534) 7(5.157,-1.264) 8(5.157,0.006)
  silkscreen extent 1.52,-4.57 3.55,0.77
SOP8#2 [mm]
  rect 2.54x0.6 smd: 1(-0.006,0.006)
  oval 2.54x0.6 smd: 2(-0.006,-1.264) 3(-0.006,-2.534) 4(-0.006,-3.804) 5(5.074,-3.804) 6(5.074,-2.534) 7(5.074,-1.264) 8(5.074,0.006)
  silkscreen extent 1.52,-4.57 3.55,0.77
SOT23 [mil]
  rect 36x36 smd: 1(-0.49,0.35) 3(74.51,0.35)
  rect 36x50 smd: 2(37.51,80.35)
  silkscreen extent -20,-5 95,85
SOT-143B [mil]
  rect 46x46 smd: 1(0,0)
  rect 36x46 smd: 2(70,0) 3(70,86) 4(-5,86)
  silkscreen extent -45,-6 91,73
SW [mm]
  rect 2.5x0.7 smd: 1(-0.006,0.008)
  oval 2.5x0.7 smd: 2(7.994,0.008)
  silkscreen extent -1.53,-1.84 9.65,1.86
SW1#1 [mm]
  round 1.27 hole 0.762: 1(0.011,0.396)
  round 1.6 hole 0.8: 2(0.011,8.515)
  silkscreen extent -1.99,-0.74 2.01,9.26
SW1#2 [mm]
  round 1.27 hole 0.762: 1(0.011,0.523)
  round 1.6 hole 0.8: 2(0.011,8.515)
  silkscreen extent -1.99,-0.74 2.01,9.26
SW1#3 [mm]
  round 1.27 hole 0.762: 1(0.011,0.514)
  round 1.6 hole 0.8: 2(0.011,8.515)
  silkscreen extent -1.99,-0.74 2.01,9.26
TO5B [mm]
  rect 3.1x0.9 smd: 1(-0.001,-0.004)
  oval 3.1x1 smd: 2(0.024,-1.706) 3(0.05,-3.407) 4(0.05,-5.109) 5(-0.001,-6.811)
  rect 6x9.5 smd: 6(13.199,-3.204)
  silkscreen extent -1.65,-8.72 16.36,2.1
TSOP-6 [mm]
  rect 0.95x0.45 smd: 1(0.013,-0.007) 2(0.013,-0.957) 3(0.013,-1.907) 4(2.313,-1.907) 5(2.313,-0.957) 6(2.313,-0.007)
  silkscreen extent 0.61,-2.51 1.71,0.59
TSSOP20 [mm]
  rect 1.8x0.4 smd: 1(0,0)
  oval 1.8x0.4 smd: 2(0,-0.65) 3(0,-1.3) 4(0,-1.95) 5(0,-2.6) 6(0,-3.25) 7(0,-3.9) 8(0,-4.55) 9(0,-5.2) 10(0,-5.85) 11(6.6,-5.85) 12(6.6,-5.2) 13(6.6,-4.55) 14(6.6,-3.9) 15(6.6,-3.25) 16(6.6,-2.6) 17(6.6,-1.95) 18(6.6,-1.3) 19(6.6,-0.65) 20(6.6,0)
  silkscreen extent 1.73,-6.18 4.87,0.33
TXZ-GSM [mm]
  round 2.2 hole 1.5: 1(-0.011,-0.001) 2(3.489,3.499) 3(6.989,-0.001) 4(3.489,-0.001) 5(3.489,-3.501)
  silkscreen extent -1.01,-4.5 7.99,4.5
USB-A [mm]
  round 1.8 hole 1.2: 1(0,0) 4(7,0)
  round 1.5 hole 1.2: 2(2.5,0) 3(4.5,0)
  round 3.5 hole 2.5: 5(-3.07,-2.71) 5(10.07,-2.71)
  silkscreen extent -3.07,-12.95 10.07,1.52
W5500 [mil]
  oval 52x7.87 smd: 1(-197,92.75)
  rect 52x7.87 smd: 2(-197,73.07) 3(-197,53.38) 4(-197,33.7) 5(-197,14.01) 6(-197,-5.67) 7(-197,-25.36) 8(-197,-45.04) 9(-197,-64.73) 10(-197,-84.41) 11(-197,-104.1) 12(-197,-123.78) 25(177.02,-123.78) 26(177.02,-104.1) 27(177.02,-84.41) 28(177.02,-64.73) 29(177.02,-45.04) 30(177.02,-25.36) 31(177.02,-5.67) 32(177.02,14.01) 33(177.02,33.7) 34(177.02,53.38) 35(177.02,73.07) 36(177.02,92.75)
  rect 7.87x52 smd: 13(-118.26,-202.52) 14(-98.57,-202.52) 15(-78.89,-202.52) 16(-59.2,-202.52) 17(-39.52,-202.52) 18(-19.84,-202.52) 19(-0.15,-202.52) 20(19.53,-202.52) 21(39.22,-202.52) 22(58.9,-202.52) 23(78.59,-202.52) 24(98.27,-202.52) 37(98.27,171.49) 38(78.59,171.49) 39(58.9,171.49) 40(39.22,171.49) 41(19.53,171.49) 42(-0.15,171.49) 43(-19.84,171.49) 44(-39.52,171.49) 45(-59.2,171.49) 46(-78.89,171.49) 47(-98.57,171.49) 48(-118.26,171.49)
  silkscreen extent -137,-142 117,111
ZS-32.768 [mil]
  oval 30x20 / inner oval 40x28 / far side oval 40x28 hole 20: 1(0.21,0.15)
  oval 30x28 / inner oval 40x28 / far side oval 40x28 hole 20: 2(-0.79,52.15)
  rect 78.74x98.42 smd: 3(295,25)
  silkscreen extent 33,-14 283,66
ZS_SMD [mil]
  oval 200x70 smd: 1(0,0) 2(340,0)
  silkscreen extent -51,-92 399,88

## Part data
C1 C2 C3 C4 C5 C6 C7 C8 C9 C10 C11 C12 C13 C14 C15 C16 C36 C37 C40 C41: library part CAP1
C17 C18 C19 C20 C21 C23 C24 C32 C38 C39 C42 C44 C47 C48 C49 C50 C51 C53 C54 C55 C56 C57 C58 C59 C62 C63 C64 C65 C73 C76 C77 C80 C81 C82 C83 C84 C85 C86 C87 C88: library part CAP, "Capacitor"
C22 C26 C27 C28 C29: library part CAP1, "CAP"
C25: library part CAP_1
C30 C72: library part 0.1uF, "C0603"
C31 EC1 EC4: library part CAP2
C33 C52 C60 C61 C66 C67 C68 C69 C70 C71: library part CAP, "CAP"
C43 C45 C46 EC2 EC3: library part "CAPACITOR POL", "Capacitor"
C74 C75 C78 C79: library part Cap, "Capacitor"
C89 C90: library part CAP
D6 D7 D8 D9 D12 D15 D17 D20: library part DIODE
EC5 EC6: library part ELECTRO2
F1: library part FUSE1, "Fuse"
J1 J2 J9: library part "4 HEADER", "4 Pin Header"
J4 J6 J10: "Connector"
J13: library part UIM6
L3 L6 L7 L8 L9: library part INDUCTOR
L4 L5 R10 R11 R12 R13 R14 R15 R16 R17 R18 R19 R20 R21 R22 R23 R31 R32 R46 R47 R48 R49 R50 R51 R52 R53 R55 R56 R57 R59 R60 R62 R63 R64 R101 R102 R143 R144 R145 R146: library part RES-1, "RES"
LED1 LED2 LED3 LED4 LED5 LED6 LED7: library part LED
MAKE1 MARKE1 MARKE2 MARKE3 T1: library part CON1, "Connector"
Q1 Q2 Q3 Q4 Q5 Q6 Q7 Q8 Q9: library part NPN
R1 R2 R5 R6 R7 R8 R24 R26 R28 R29 R30 R33 R34 R35 R54 R58 R61 R65 R66 R67 R68 R69 R70 R71 R74 R75 R76 R77 R78 R79 R80 R81 R82 R83 R84 R85 R117 R118 R119 R120 R121 R122 R123 R124 R125 R126 R127 R128 R129 R130 R137 R138 R139 R140 R141 R142: library part RES1
R3 R4 R25 R27: library part R_S
R36 R37 R38 R39 R86 R87 R88 R89 R90 R116: library part RES2
R40 R41 R42 R43 R44 R45 R91 R92 R93 R94 R97 R98 R99 R100 R103 R110 R114 R115: library part RES
RL1 RL2 RL3 RL4: library part JQ1P-12V
SW3: library part SW-PB
TVS1 TVS4 TVS6: library part TVS
TVS2 TVS3 TVS5: library part TVS-D
U1: library part LPC1778LQFP144
U3 U16: library part MAX232ESE
U10: library part NUP4301, "NUP4301MR6T1"
U11: "Bell"
U12: library part LU1T516, "LU1T516"
U14: library part MX25L1635EM2I-10G
U15: library part PRTR5V0U2X_1
UG1 UG2 UG3 UG4: library part PS2501-1
Y1 Y2: library part CRYSTAL
Y3: library part CRYSTAL, "Crystal"

## Free pads (board coordinates)
  round 267.72 hole 177.17: 0(196.85,196.85) 1(196.85,4212.6) 2(6102.36,4212.6) 3(6102.36,196.85)
  round 22 hole 10: 0(690,2225) 1(885,2225) 2(1025,2225) 3(145,1560) 3(1175,2230) 4(270,1560) 4(1020,2365) 5(400,1555) 5(1180,2360) 6(145,1465) 6(1180,2480) 7(275,1470) 7(1045,2870) 8(405,1475) 8(1170,2865) 9(145,1655) 9(1100,2755) 10(270,1655) 10(985,2760) 11(400,1655) 11(1260,2625) 12(115,905) 12(1435,2620) 13(200,905) 13(1435,2750) 14(290,905) 14(1755,2745) 15(205,820) 15(1940,2745) 16(290,815) 16(910,2680) 17(295,700) 17(1055,2680) 18(395,805) 18(690,2385) 19(80,2460) 19(510,805) 20(645,1655) 20(980,3355) 21(740,1655) 21(910,3265) 22(835,1660) 22(910,3180) 23(650,1565) 23(910,3090) 24(740,1570) 24(1630,3375) 25(835,1560) 25(1690,3230) 26(650,1470) 26(1690,3150) 27(760,1470) 27(1825,3170) 28(840,1480) 28(1910,3170) 29(1110,1605) 29(2085,3125) 30(1205,1605) 30(2085,3025) 31(1330,1605) 31(2685,2735) 32(1445,1605) 32(2745,2735) 33(2735,2790) 34(2815,2870) 35(2850,2830) 36(2890,2885) 37(2855,2910) 38(2890,2960) 39(2930,2925) 40(3025,2835) 41(2990,2795) 42(3060,2790) 43(3210,2825) 44(3170,2865) 45(3130,2910) 46(3150,2965) 47(3385,2880) 48(3390,2940) 49(2915,3195) 50(2915,3130) 51(2975,3145) 52(2975,3085) 53(3030,3100) 54(3025,3030) 55(885,2980) 56(415,2630) 57(90,2215) 58(165,2215) 59(1985,3550) 60(1985,3505) 61(1985,3455) 62(1975,3690) 63(2045,3630) 64(2110,3560) 65(2110,3465) 66(2110,3365) 67(2110,3290) 68(2325,3510) 69(2325,3435) 70(2390,3600) 71(2535,3595) 72(2600,3595) 73(2515,3450) 74(2665,3450) 75(2680,3385) 76(2785,3330) 77(2330,3615) 78(2790,3500) 79(2760,3540) 80(2905,3770) 81(2785,3800) 82(2900,3565) 83(2900,3480) 84(3040,3770) 85(3040,3675) 86(3040,3570) 87(2940,4110) 88(3040,4110) 89(3040,4005) 90(3435,3775) 91(3435,3680) 92(3435,3560) 93(3440,3410) 94(3475,3225) 95(3555,3225) 96(3655,3225) 97(3740,3225) 98(3815,3225) 99(3810,3390) 100(3620,3495) 101(3715,3495) 102(3620,3580) 103(3720,3580) 104(3620,3665) 105(3715,3670) 106(3620,3755) 107(3715,3755) 108(3635,3960) 109(3725,3960) 110(3830,3960) 111(3725,4060) 112(3825,4265) 113(3935,4265) 114(4055,4265) 115(4170,4265) 116(4295,4265) 117(3580,2690) 118(3685,2690) 119(3790,2690) 120(3900,2690) 121(3995,2690) 122(3580,2610) 123(3685,2610) 124(3790,2610) 125(3900,2610) 126(3995,2610) 127(3580,2515) 128(3690,2515) 129(3795,2515) 130(3900,2515) 131(3995,2515) 132(3580,2430) 133(3690,2430) 134(3795,2435) 135(3900,2435) 136(3995,2435) 137(3580,2345) 138(3690,2350) 139(3795,2350) 140(3900,2350) 141(3995,2350) 142(3995,2270) 143(3900,2270) 144(3795,2270) 145(3690,2270) 146(3580,2270) 147(3485,2430) 148(3485,2345) 149(3485,2270) 150(2085,2430) 151(2085,2335) 152(2085,2240) 153(2085,2170) 154(2070,1995) 155(2330,1935) 156(2295,1935) 157(2410,2100) 158(2450,2175) 159(2560,2175) 160(2560,2230) 161(2330,2455) 162(2330,2365) 163(2330,2275) 164(2710,3235) 165(2755,3235) 166(1175,2100) 167(1175,1975) 168(1175,1845) 169(1170,1745) 170(1025,2075) 171(1020,1980) 172(1075,1845) 173(1095,1745) 174(430,2425) 175(430,2365) 176(430,2275) 177(120,2075) 178(190,2075) 179(255,2075) 180(260,1990) 181(190,1990) 182(125,1990) 183(125,1905) 184(190,1905) 185(260,1905) 186(260,1830) 187(190,1830) 188(115,1830) 189(130,1315) 190(200,1315) 191(265,1315) 192(130,1235) 193(200,1235) 194(265,1235) 195(130,1155) 196(200,1155) 197(265,1155) 198(130,1075) 199(200,1075) 200(265,1075) 201(1360,1230) 202(1435,1230) 203(1510,1230) 204(1595,1230) 205(1595,1165) 206(1510,1165) 207(1435,1165) 208(1360,1165) 209(1395,1085) 210(1395,1025) 211(1405,840) 212(1405,780) 213(1405,720) 214(1405,655) 215(1490,720) 216(1490,650) 217(1570,700) 218(1645,700) 219(1570,645) 220(1440,580) 221(1825,690) 222(1900,690) 223(1960,690) 224(1960,755) 225(1960,815) 226(1910,965) 227(1905,1130) 228(1905,1205) 229(690,2450) 230(690,2510) 231(690,2290) 232(625,2225) 233(1760,2520) 234(1940,2515) 235(1940,2340) 236(1935,2145) 237(1935,2025) 238(1935,1870) 239(1815,2145) 240(1440,2145) 241(1630,2150) 242(1620,1880) 243(1440,1880) 244(1820,1885) 245(2335,2730) 246(2335,2665) 247(2105,2720) 248(2670,2940) 249(2130,2970) 250(2130,3075) 251(2035,3075) 252(2035,2975) 253(5910,3625) 254(6040,3525) 255(6040,3340) 256(6045,3120) 257(6045,2955) 258(6045,2805) 259(6050,2630) 260(6050,2445) 261(6050,2270) 262(6045,2055) 263(6050,1780) 264(6045,1405) 265(6045,1300) 266(5910,1140) 267(5830,1780) 268(5915,1780) 269(5875,1690) 270(5915,1870) 271(5915,1975) 272(5915,2105) 273(5915,2245) 274(5910,2370) 275(5735,2370) 276(5575,2370) 277(5385,2370) 278(5215,2370) 279(5055,2370) 280(4925,2370) 281(4810,2600) 282(4930,2600) 283(5055,2595) 284(5210,2595) 285(5050,2475) 286(4930,2475) 287(4815,2480) 288(4720,2305) 289(4760,2255) 290(4710,2225) 291(4800,2200) 292(4710,1995) 293(4830,1905) 294(4840,1945) 295(4975,1905) 296(5025,1905) 297(5210,1905) 298(5410,1905) 299(5570,1905) 300(5690,1905) 301(4975,1785) 302(5075,1785) 303(5205,1785) 304(5335,1785) 305(5460,1785) 306(5590,1785) 307(5075,1700) 308(5205,1705) 309(5330,1705) 310(5460,1705) 311(5590,1705) 312(5330,1620) 313(5465,1620) 314(5330,1550) 315(5440,1545) 316(5585,2020) 317(5695,2020) 318(5845,2020) 319(4975,2210) 320(5140,2210) 321(5295,2215) 322(5440,2215) 323(5595,2220) 324(5295,2755) 325(5165,2740) 326(5050,2740) 327(4930,2740) 328(4810,2740) 329(4790,2890) 330(4965,2890) 331(5045,2890) 332(4335,2940) 333(4395,2865) 334(4460,2795) 335(4395,2795) 336(4325,2795) 337(4330,2865) 338(4325,2715) 339(4575,2940) 340(4150,3210) 341(4225,3160) 342(4315,3130) 343(4590,3345) 344(4595,3265) 345(4520,3260) 346(4415,3415) 347(4505,3415) 348(4420,3335) 349(3970,3495) 350(4470,3515) 351(4410,3585) 352(4285,3670) 353(4130,3945) 354(4145,3805) 355(4180,3805) 356(4275,3955) 357(4420,3980) 358(4495,3980) 359(4595,3980) 360(4705,3980) 361(4805,3980) 362(4905,3980) 363(4805,3895) 364(4705,3895) 365(4910,3895) 366(4805,3815) 367(4710,3810) 368(4710,3725) 369(5110,3835) 370(5060,3765) 371(4990,3695) 372(4930,3630) 373(4860,3570) 374(4795,3500) 375(4955,3415) 376(4950,3285) 377(4905,3355) 378(5000,3355) 379(5040,3430) 380(5030,3510) 381(5120,3510) 382(5115,3455) 383(5350,3255) 384(5355,3455) 385(5350,3285) 386(5410,3075) 387(5465,3075) 388(5525,3075) 389(5575,3075) 390(5465,3015) 391(5575,3015) 392(5410,3020) 393(5630,2850) 394(5680,2850) 395(5630,2795) 396(5680,2800) 397(4700,1135) 398(4860,1135) 399(5020,1130) 400(5180,1130) 401(5375,1130) 402(5530,1130) 403(5680,1125) 404(5830,1125) 405(5280,1385) 406(5465,1385) 407(5280,1285) 408(5465,1290) 409(3100,1035) 410(3170,1035) 411(3075,1370) 412(3075,1340) 413(3075,1300) 414(3255,1485) 415(3310,1485) 416(3360,1485) 417(3485,1415) 418(3485,1375) 419(3485,1320) 420(3735,1470) 421(3775,1470) 422(3890,1400) 423(3890,1350) 424(3890,1300) 425(4060,1760) 426(4130,1700) 427(4065,1700) 428(4065,1630) 429(4130,1630) 430(4215,1630) 431(4310,1630) 432(4060,1540) 433(4135,1540) 434(4220,1540) 435(4315,1540) 436(4170,1470) 437(4320,1400) 438(4320,1335) 439(4325,1265) 440(4420,1680) 441(4485,1680) 442(4420,1620) 443(4485,1620) 444(4425,1530) 445(4485,1530) 446(4600,1675) 447(4660,1675) 448(4670,1520) 449(4740,1520) 450(4750,1595) 451(4690,1390) 452(4690,1295) 453(5150,1395) 454(4180,2045) 455(4265,2045) 456(4180,1970) 457(4265,1970) 458(4180,1905) 459(4265,1905) 460(4440,2000) 461(4440,1955) 462(4440,1905) 463(4595,1900) 464(4690,1900) 465(3575,2135) 466(3625,2135) 467(3690,2135) 468(3750,2135) 469(3830,2135) 470(3980,2135) 471(4035,2135) 472(4105,2135) 473(4130,2245) 474(4130,2360) 475(4130,2480) 476(4130,2610) 477(4355,2560) 478(4310,2515) 479(4070,2820) 480(4130,2740) 481(3835,2820) 482(3760,2820) 483(3665,2820) 484(3585,2820) 485(3440,2815) 486(3435,2705) 487(3435,2610) 488(2960,2690) 489(3095,2690) 490(2070,1735) 491(2120,1735) 492(2165,1735) 493(2305,1735) 494(2460,2220) 495(2410,2145) 496(2615,2460) 497(2670,2425) 498(2710,2380) 499(2760,2365) 500(2760,2295) 501(2825,2160) 502(2770,2045) 503(2770,1970) 504(2775,1900) 505(2890,1830) 506(2990,1960) 507(3030,2005) 508(2715,1810) 509(2665,1810) 510(3170,1840) 511(3170,1785) 512(3170,1725) 513(3170,1675) 514(2940,1830) 515(2825,1830) 516(2095,1610) 517(2095,1540) 518(2095,1460) 519(2095,1390) 520(2360,1435) 521(2440,1435) 522(2545,1435) 523(2630,1435) 524(2720,1435) 525(2890,1555) 526(2075,1210) 527(2075,1160) 528(2075,1110) 529(2025,975) 530(2095,975) 531(1735,1130) 532(1735,1080) 533(1735,1605) 534(1880,1605) 535(1735,1495) 536(1880,1500) 537(1880,1400) 538(1735,1400) 539(1450,1500) 540(1450,1405) 541(1340,1500) 542(1330,1405) 543(2300,1150) 544(2335,1130) 545(2295,1110) 546(2500,1150) 547(2535,1125) 548(2500,1115) 549(2700,1150) 550(2745,1125) 551(2700,1110) 552(2905,1145) 553(2935,1115) 554(2905,1110) 555(2945,1370) 556(2910,1325) 557(2935,1280) 558(3260,2035) 559(3315,2030) 560(2900,2490) 561(2950,2490) 562(2980,2220) 563(3145,2220) 564(2970,2335) 565(3170,2395) 566(3170,2365) 567(2680,3335) 568(2585,3485) 569(2680,3590) 570(4795,3275) 571(4795,3390) 572(5605,3505) 573(5735,3510) 574(5770,3510) 575(5665,3390) 576(5685,3385) 577(5540,3530) 578(5350,3400) 579(5620,3210) 580(5670,3210) 581(5620,3155) 582(5670,3155) 583(5855,3460) 584(5895,3425) 585(5920,3340) 586(5930,3220) 587(5930,3300) 588(5935,3085) 589(5935,3015) 590(5940,2875) 591(5940,2805) 592(5940,2730) 593(5940,2665) 594(5820,2475) 595(5940,2475) 596(3450,1645) 597(3475,1645) 598(3605,1695) 599(3605,1655) 600(3605,1615) 601(3675,1620) 602(3750,1620) 603(3915,1910) 604(3935,1910) 605(2135,3785) 606(2135,3735) 607(2135,3685) 608(2310,3790) 609(2390,3790) 610(1875,3945) 611(1960,3945) 612(2040,3945) 613(4115,2955) 614(4135,2960) 615(4145,2940) 616(5425,3300) 617(5435,3260) 618(5580,2575) 619(5625,2575) 620(5675,2575) 621(3465,1885) 622(3465,3075) 623(3510,3075) 624(3935,2820) 625(5025,3135) 626(5035,3070) 627(5100,3060) 628(5160,3065) 629(5245,3155) 630(3465,1860) 631(3495,1855) 632(4530,2360) 633(4580,2360) 634(4605,2315) 635(1170,3015) 636(1295,3010) 637(1130,3215) 638(1325,3120) 639(1330,3175) 640(1225,3010) 641(1355,3010) 642(800,810) 643(920,805) 644(920,755) 645(920,855) 646(865,830) 647(865,785) 648(865,735) 649(920,695) 650(800,765) 651(800,715) 652(750,765) 653(750,725) 654(710,735) 655(690,605) 656(690,565) 658(920,630) 659(865,690) 660(865,635) 661(800,680) 662(800,640) 663(760,680) 664(1075,870) 665(1080,895) 666(1095,870) 667(3480,2820) 668(3435,2775) 669(3285,2445) 670(5215,3065) 671(1100,3375) 672(1215,3365) 673(1250,3360) 674(1265,3115) 675(1375,3115) 676(1585,3115) 677(1690,3295) 678(1695,3375) 679(1550,3375) 680(3895,3680) 681(3915,3685) 682(3535,1030) 683(3615,1030) 684(3955,1020) 685(4040,1020) 686(4385,1030) 687(4475,1030)

## Via types
v1: diameter 22, hole 10, Top Layer to Bottom Layer, 82 vias
v2: diameter 24, hole 10, Top Layer to Bottom Layer, 15 vias
v3: diameter 30, hole 12, Top Layer to Bottom Layer, 10 vias
v4: diameter 32, hole 15, Top Layer to Bottom Layer, 7 vias
v5: diameter 36, hole 18, Top Layer to Bottom Layer, 4 vias
v6: diameter 36, hole 20, Top Layer to Bottom Layer, 3 vias
v7: diameter 32, hole 12, Top Layer to Bottom Layer, 2 vias
v8: diameter 40, hole 20, Top Layer to Bottom Layer, 2 vias
v9: diameter 36, hole 15, Top Layer to Bottom Layer, 2 vias
v10: diameter 62, hole 30, Top Layer to Bottom Layer, 2 vias
v11: diameter 52, hole 28, Top Layer to Bottom Layer, 1 vias
v12: diameter 24, hole 12, Top Layer to Bottom Layer, 1 vias
v13: diameter 32, hole 18, Top Layer to Bottom Layer, 1 vias
v14: diameter 50, hole 28, Top Layer to Bottom Layer, 1 vias
v15: diameter 32, hole 16, Top Layer to Bottom Layer, 1 vias
v16: diameter 28, hole 15, Top Layer to Bottom Layer, 1 vias
v17: diameter 22, hole 12, Top Layer to Bottom Layer, 1 vias
v18: diameter 25, hole 12, Top Layer to Bottom Layer, 1 vias
v19: diameter 42, hole 20, Top Layer to Bottom Layer, 1 vias